# Altium PCB BB_BME680.PcbDoc
Units mm, origin at the board's own origin, x right, y up, seen from the top; angles counter-clockwise.
Board outline 39.15 x 31.32 mm, 2 copper layers (Top Layer, Bottom Layer); 16 components, 10 nets, 49 pads, 10 vias.
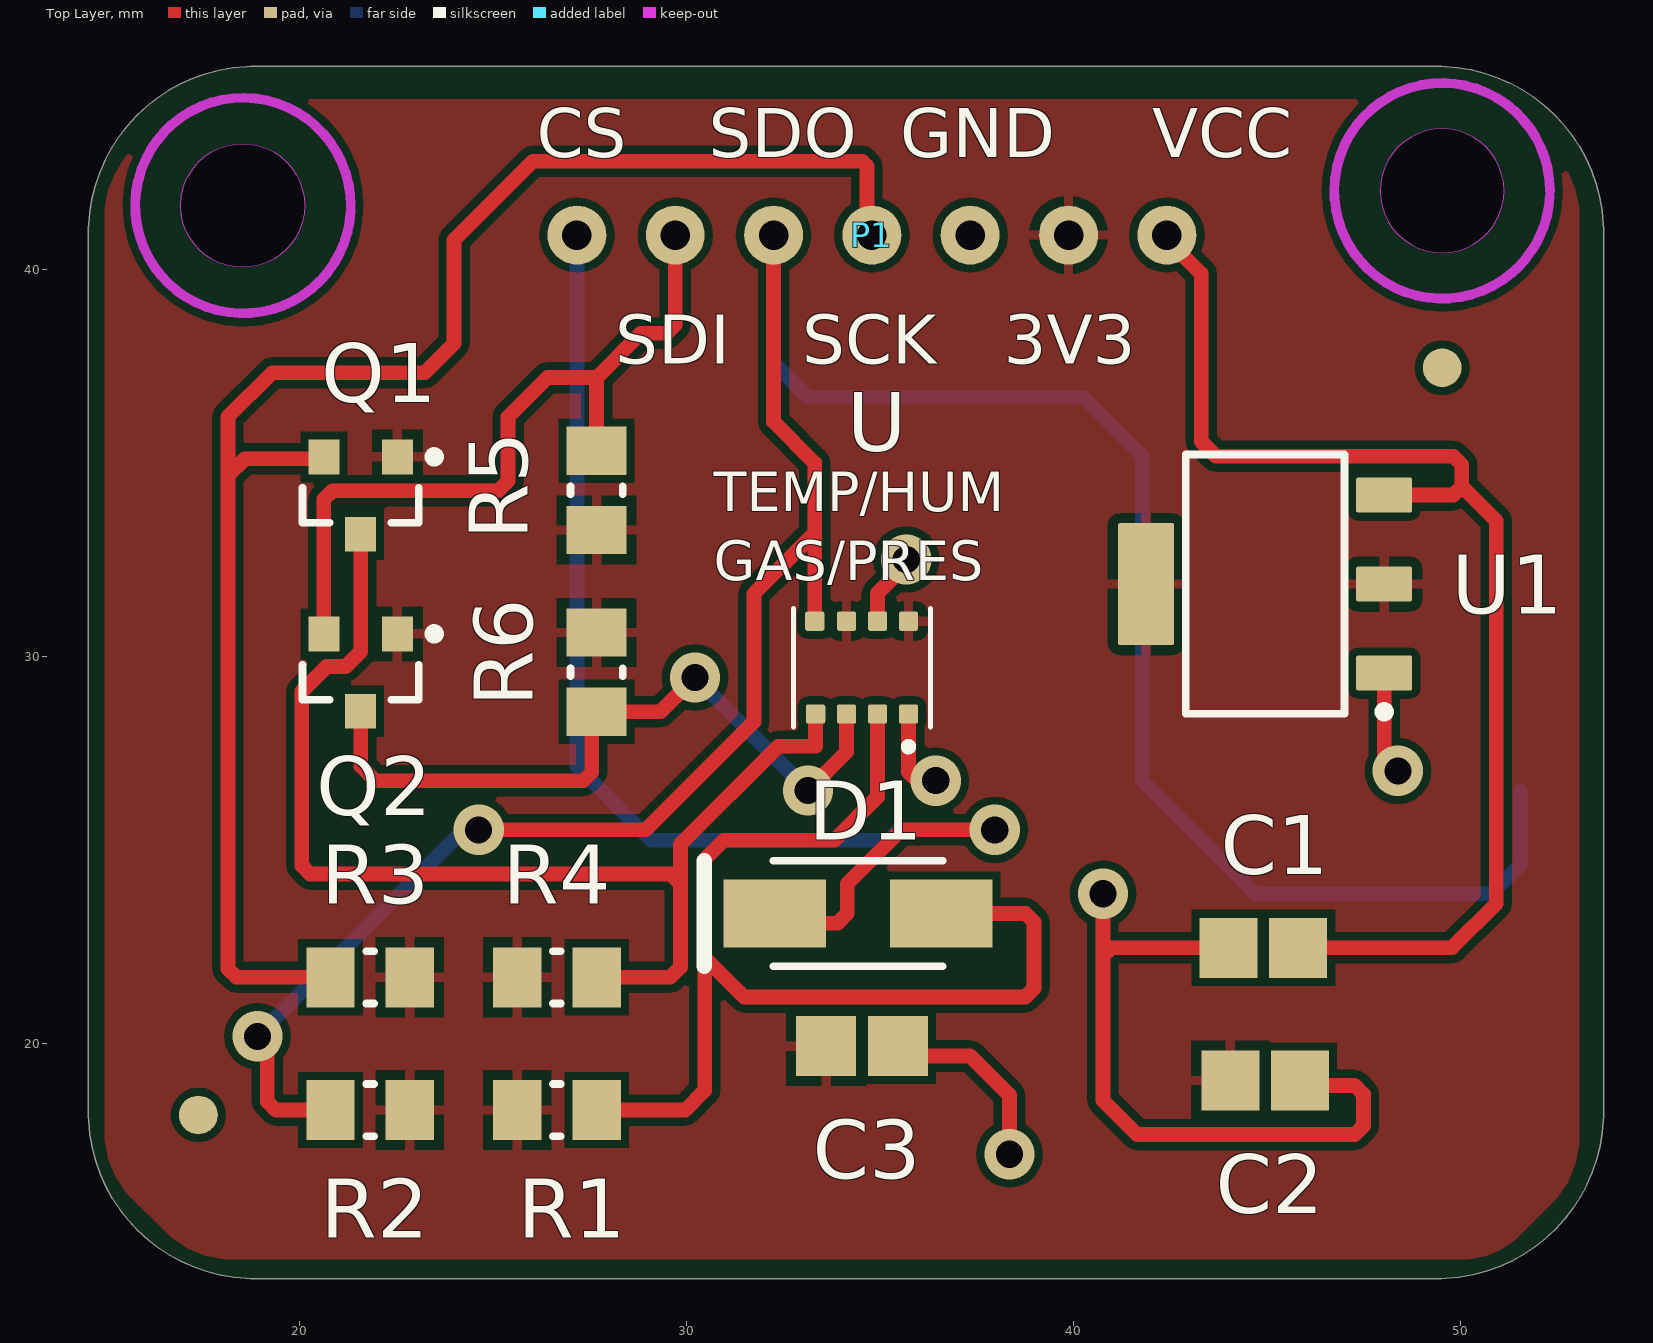
[diagram p0: Top Layer view]
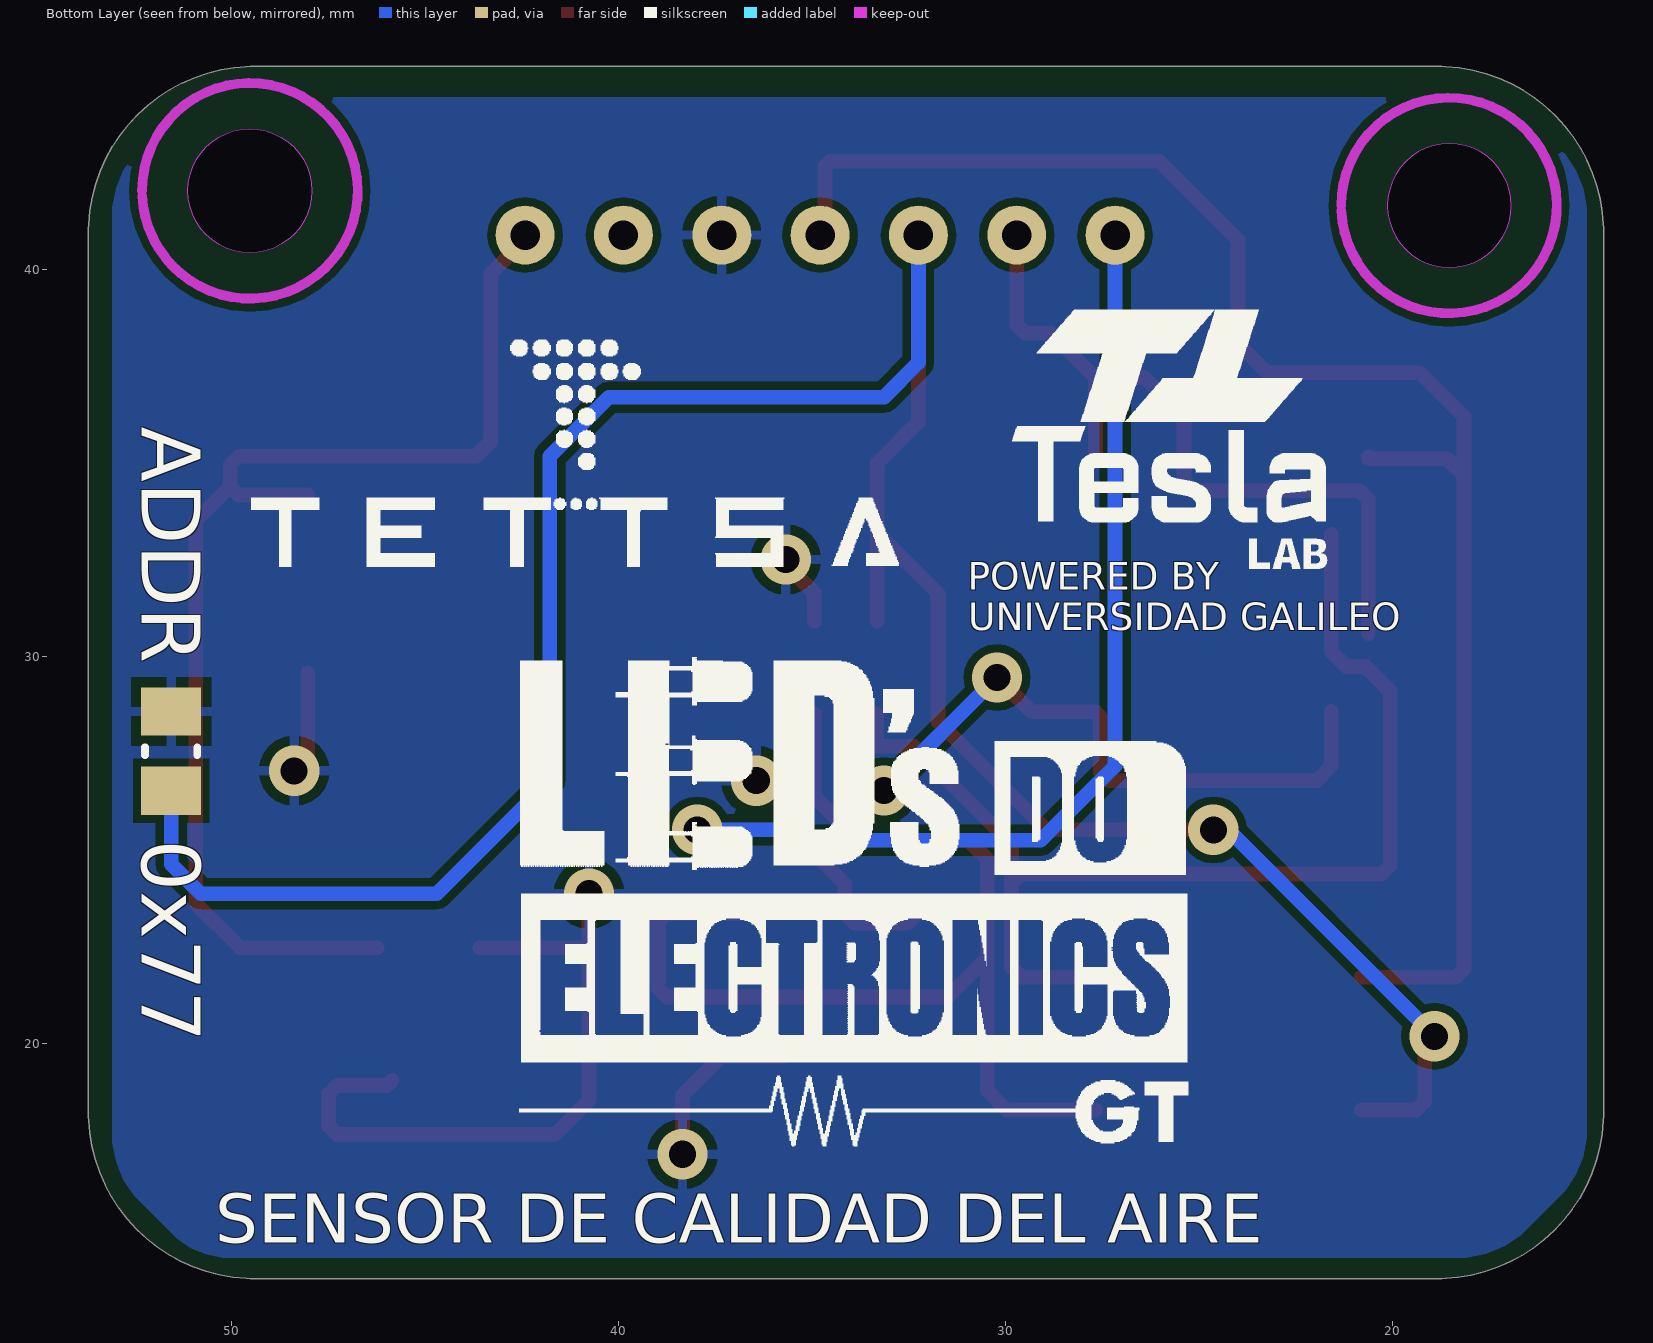
[diagram p1: Bottom Layer view, seen from below]

## Layer stack, top to bottom
Top Solder: solder mask 0.0102, Solder Resist, Dk 3.5
Top Layer: signal copper 0.0356
Dielectric 1: dielectric 0.32, FR-4, Dk 4.8
Bottom Layer: signal copper 0.0356
Bottom Solder: solder mask 0.0102, Solder Resist, Dk 3.5

## Board outline
14.562,18.013 cw(c18.925,18.232) 14.556,18.232 14.556,40.953 cw(c18.925,40.953) 14.562,41.179 cw(c18.88,40.955) 14.588,41.479 cw(c18.855,40.952) 18.635,45.246 cw(c18.854,40.882) 18.855,45.251 49.404,45.251 cw(c49.405,40.883) 49.631,45.245 cw(c49.407,40.928) 49.93,45.219 cw(c49.403,40.952) 53.697,41.172 cw(c49.334,40.953) 53.703,40.953 53.703,18.232 cw(c49.334,18.232) 53.697,18.006 cw(c49.379,18.23) 53.671,17.706 cw(c49.404,18.233) 49.624,13.94 cw(c49.405,18.303) 49.404,13.934 18.855,13.934 cw(c18.854,18.302) 18.628,13.94 cw(c18.852,18.257) 18.329,13.966 cw(c18.855,18.233)
cut-out: 18.542,40.056 cw(c18.542,41.656) 16.942,41.656 cw(c18.542,41.656) 18.542,43.256 cw(c18.542,41.656) 20.142,41.656 cw(c18.542,41.656)
cut-out: 47.93,42.037 ccw(c49.53,42.037) 49.53,40.437 ccw(c49.53,42.037) 51.13,42.037 ccw(c49.53,42.037) 49.53,43.637 ccw(c49.53,42.037)

## Design rules (kind name [scope] priority, off if disabled: settings)
Clearance [All] p1: gap=0.203 ignorepadtopadclearanceinfootprint=FALSE except(0: Arc-Hole Track-Hole SMDPad-Hole THPad-Hole Via-Hole Fill-Hole Poly-Hole Region-Hole Text-Hole; 0.254: Arc-Text Track-Text SMDPad-Text THPad-Text Via-Text Fill-Text Poly-Text Region-Text Text-Text)
HoleSize [All] p1: absolutevalues=TRUE maxlimit=2.54 minlimit=0.5 maxpercent=80.000 minpercent=20.000
MinimumAnnularRing [All] p1: minimumring=0.3
MinimumSolderMaskSliver [All] p1: minsoldermaskwidth=0.05
PolygonConnect [All] p1: connectstyle=Relief reliefconductorwidth=0.254 reliefentries=4 polygonreliefangle="90 Angle" airgapwidth=0.254
RoutingVias [All] p1: holewidth=0.711 width=1.27 viastyle="Through Hole" minholewidth=0.711 minwidth=1.27 maxholewidth=0.711 maxwidth=1.27
SilkToSolderMaskClearance [IsPad] p1: minsilkscreentomaskgap=0.05 clearancetoexposedcopper=TRUE
SolderMaskExpansion [All] p1: expansion=0.102 istentingtop=FALSE
Width [All] p1: maxlimit=0.635 minlimit=0.203 preferedwidth=0.254
27 further rules are at their usual default settings.

## Components (designator, comment, footprint, x,y, rotation, side; value= is the part's Value field where it differs from the comment)
ADDR "JUMPER" RESC2013X60X30ML20T20 51.562,27.559 r90 bottom
C1 "C0805C106K4PACTU" CAPC2013X140X50ML20T25 44.912,22.479 r180 top
C2 "C0805C106K4PACTU" CAPC2013X140X50ML20T25 44.958,19.05 r180 top
C3 "08051C104KAT2A" CAPC2013X94X50ML20T25 34.544,19.939 r180 top
D1 "S1G" FAIR-DO-214AC-2_V 34.436,23.368 r180 top
P1 "PIN_HEADER_7" PIN_HEADER_7 27.178,40.894 r0 top
Q1 "BSS138-7-F" DIOD-SOT23-3_V 21.59,34.163 r270 top
Q2 "BSS138-7-F" DIOD-SOT23-3_V 21.59,29.591 r270 top
R1 "RK73B2ATTD103J" RESC2013X60X30ML20T20 26.661,18.288 r0 top
R2 "RK73B2ATTD103J" RESC2013X60X30ML20T20 21.835,18.288 r180 top
R3 "RK73B2ATTD103J" RESC2013X60X30ML20T20 21.835,21.717 r180 top
R4 "RK73B2ATTD103J" RESC2013X60X30ML20T20 26.661,21.717 r0 top
R5 "RK73B2ATTD103J" RESC2013X60X30ML20T20 27.686,34.299 r90 top
R6 "RK73B2ATTD103J" RESC2013X60X30ML20T20 27.686,29.6 r270 top
U "BME680" BME680 34.544,29.718 r270 top
U1 "LM1117MPX-3.3/NOPB" DCY0004A_L 44.958,31.877 r180 top

## Footprints (in the part's own frame and the unit in brackets; to place one, negate y for a bottom-side part, rotate by r counter-clockwise, add the part's x,y. Pads: shape width x height; smd on the part's side, far side on the other; paste and mask are expansions set on the pad)
BME680 [mm]
  rrect25% 0.5x0.5 smd: 1(1.2,1.2) 2(1.2,0.4) 3(1.2,-0.4) 4(1.2,-1.2) 5(-1.2,-1.22) 6(-1.2,-0.4) 7(-1.2,0.4) 8(-1.2,1.2)
  silkscreen extent -1.53,-1.77 2.14,1.77, body extent -1.5,-1.5 1.5,1.5, height 1
CAPC2013X94X50ML20T25 [mm] "Chip Capacitor, 2-Leads, Body 2.01x1.25mm, IPC Low Density"
  rect 1.55x1.55 smd: 1(-0.925,0) 2(0.925,0)
  body extent -1.1,-0.72 1.11,0.72, height 0.94
CAPC2013X140X50ML20T25 [mm] "Chip Capacitor, 2-Leads, Body 2.00x1.25mm, IPC Low Density"
  rect 1.5x1.55 smd: 1(-0.9,0) 2(0.9,0)
  body extent -1.1,-0.72 1.1,0.72, height 1.4
DCY0004A_L [mm] "SOT223, 4-Leads, Body 6.7x3.7mm, Pitch 2.3mm, IPC High Density"
  rrect11% 1.45x0.9 smd: 1(-3.075,2.3) 2(-3.075,0) 3(-3.075,-2.3)
  rrect7% 1.45x3.15 smd: 4(3.075,0)
  silkscreen extent -3.2,-3.35 2.05,3.42, body extent -3.5,-3.25 3.5,3.25, height 1.62
DIOD-SOT23-3_V [mm] "SOT23, 3-Leads, Body 3x1.4mm, Pitch 0.95mm"
  rect 0.9x0.8 smd: 1(-1,0.95) 2(-1,-0.95) 3(1,0)
  silkscreen extent -1.12,-1.5 0.7,2.03, body extent -1.25,-1.5 1.25,1.5, height 1.1
FAIR-DO-214AC-2_V [mm] "DO-214, 2-Leads, Body 4.375x2.725mm"
  rect 2.65x1.75 smd: 1(-2.15,0) 2(2.15,0)
  silkscreen extent -2.19,-1.36 3.98,1.36, body extent -2.19,-1.36 2.19,1.36, height 2.5
PIN_HEADER_7 [mil]
  round 60 hole 30: 1(0,0) 2(100,0) 3(200,0) 4(300,0) 5(400,0) 6(500,0) 7(600,0)
  body extent -50,-50 650,50, height 336
RESC2013X60X30ML20T20 [mm] "Chip Resistor, 2-Leads, Body 2.00x1.25mm, IPC Low Density"
  rect 1.25x1.55 smd: 1(-1.025,0) 2(1.025,0)
  silkscreen extent -0.1,-0.67 0.1,0.67, body extent -1.1,-0.72 1.1,0.72, height 0.6

## Part data
ADDR: library part CMP-2001-04657-1, "10 kOhms ±5% 0.25W, 1/4W Chip Resistor 0805 (2012 Metric) Automotive AEC-Q200, Moisture Resistant Thick Film", Manufacturer="KOA Speer", Part Number=RK73B2ATTD103J
C1 C2: library part CMP-2007-03242-1, "10µF ±10% 16V Ceramic Capacitor X5R 0805 (2012 Metric)", Part Number=CL21A106KOQNNNG
C3: library part CMP-2007-04174-1, Manufacturer="AVX Interconnect / Elco", Part Number=08051C104KAT2A
D1: library part CMP-2000-07011-1, "General Purpose Rectifier, 1.4 W, -55 to 150 degC, 2-Pin DO-214AC, RoHS, Tape and Reel", Average Rectified Current-Max=1A, Forward Voltage=1.1V, Manufacturer="Fairchild Semiconductor", Package Description="2-Pin Surface Mount Device, Body 4.375 x 2.725 mm", Package Reference=DO-214AC-2, Power Dissipation Max=1400mW, Reverse Current-Max=1µA, Reverse Voltage-Max [Vrrm]=400V, Datasheet URL=https://www.fairchildsemi.com/datasheets/S1/S1G.pdf, Datasheet Version="Rev. 2.10, 05/2015", Manufacturer URL=https://www.fairchildsemi.com/, Mounting Technology=SurfaceMount, Package URL=https://www.fairchildsemi.com/package-drawings/DO/DO214AC.pdf, PartNumber=S1G, Reverse Recovery Time-Max=1.8µs, Trr=1800ns, VRRM Max=400V
Q1 Q2: library part CMP-2000-04930-1, "N-Channel Enhancement Mode Mosfet, 50 V, 0.2 A, -55 to 150 degC, 3-Pin SOT23, RoHS, Tape and Reel", Id - Continuous Drain Current=200mA, Manufacturer="Diodes Inc", Maximum Operating Temperature=+150C, Minimum Operating Temperature=-55C, Package / Case=SOT-23-3, Package Description="3-Pin Small Outline Transistor, Body 2.9 x 1.3 mm, Pitch 0.96 mm", Package Reference=SOT23-3, Pd - Power Dissipation=300mW, Rds On - Drain-Source Resistance=3.5Ohms, Vds - Drain-Source Breakdown Voltage=50V, Vgs - Gate-Source Voltage=20V, Brand=DiodesIncorporated, Channel Mode=Enhancement, Configuration=Single, Datasheet URL=https://datasheet.ciiva.com/8115/ds30144-8115344.pdf, Datasheet Version="Rev. 20-2, 11/2013", Factory Pack Quantity=3000, Height=1mm, Length=2.9mm, Manufacturer URL=http://www.diodes.com/, Mounting Style=SMD/SMT, Number of Channels=1Channel, Packaging=Reel, Product=MOSFETSmallSignal, Product Category=MOSFET, RoHS=True, Series=BSS138, Technology=Si, Transistor Polarity=N-Channel, Transistor Type=1N-Channel, Typical Turn-Off Delay Time=20ns, Typical Turn-On Delay Time=20ns, Unit Weight=0.000282oz, Width=1.3mm
R1 R2 R3 R4 R5 R6: library part CMP-2001-04657-1, "10 kOhms ±5% 0.25W, 1/4W Chip Resistor 0805 (2012 Metric) Automotive AEC-Q200, Moisture Resistant Thick Film", Manufacturer="KOA Speer", Part Number=RK73B2ATTD103J
U: "Gas, Humidity, Pressure, Temperature Sensor IÂ²C, SPI Output", Package="LGA-8 Bosch Tools", Availability=Unavailable, MF="Bosch Sensortec", MP=BME680, Price=None, SnapEDA_Link=https://www.snapeda.com/parts/BME680/Bosch%20Sensortec/view-part/947201/?ref=snap
U1: library part CMP-0062-01639-4, "800mA Low-Dropout Linear Regulator, 4-pin SOT-223, Pb-Free", Manufacturer="Texas Instruments", PackageTopMarking=XYTT*N05A, PowerWise=N, Code_IPC=SOT223-4, Code_JEDEC=TO-261-AA, ComponentLink1Description="Datasheet URL", ComponentLink1URL=http://www.ti.com/general/docs/lit/getliterature.tsp?genericPartNumber=LM1117-N&fileType=pdf, CompType="LDO IC", High-Reliability=Y, PackageDescription="Molded SOT-223, 6.50 x 3.56 x 1.6mm Body, 4 Lead, 2.3mm Pitch", PackageReference=DCY0004A, PartNumber=LM1117MPX-3.3/NOPB, PinCount=4, RoHS=Y

## Free pads (board coordinates)
  round 1 smd paste+0: 100(17.399,18.161) 100(49.53,37.465)

## Via types
v1: diameter 1.3, hole 0.7, Top Layer to Bottom Layer, tented both sides, 10 vias

## Nets (pads, with @x,y where several pads share a name; then routed paths per layer and width w, separated by ;. In a path a pad name is that pad's centre, name@x,y a point inside that pad or via, vN(x,y) a via of type N, cw(c..) or ccw(c..) an arc to the next point about the centre after c; other vN are vias at no path point)
3V3: C2.2 C3.2 P1.6 Q1.1 Q2.1 R1.1 R2.1 R3.1 R4.1 R5.1 R6.1 U1.2 U1.4 U.6 U.8
CS: D1.2 P1.1 | length 32.7
  Top Layer w0.381: D1.2 32.54,23.114 33.909,23.114 34.163,23.368 34.163,24.13 35.56,25.527 v1(37.973,25.527)
  Bottom Layer w0.381: P1.1 27.178,27.178 29.096,25.26 35.22,25.26 35.487,25.527 v1(37.973,25.527)
CS_3V: D1.1 R1.2 U.2 | length 29.5
  Top Layer w0.381: R1.2 29.972,18.288 30.48,18.796 30.48,22.225 ; U.2 34.944,26.377 33.827,25.26 30.975,25.26 30.48,24.765 30.48,22.225 ; D1.1 38.766,23.368 38.989,23.145 38.989,21.432 38.766,21.209 31.496,21.209 31.369,21.336 30.48,22.225
GND: ADDR.2 C1.2 C2.1 C3.1 P1.5 U1.1 U.1 U.7 | length 29.9
  Top Layer w0.381: U.7 34.944,31.642 35.687,32.385 v1(35.687,32.512) ; C3.1 35.723,19.685 37.338,19.685 38.354,18.669 v1(38.354,17.145) ; U.1 35.744,27.02 35.967,26.797 v1(36.449,26.797) ; v1(40.767,23.876) 40.767,22.256 ; C1.2@43.587,22.479 40.99,22.479 40.767,22.256 ; C2.1 45.985,18.923 47.275,18.923 47.498,18.7 47.498,17.876 47.275,17.653 41.656,17.653 40.767,18.542 40.767,22.256 ; U1.1 48.033,27.405 v1(48.387,27.051)
SCK/SCL: P1.4 Q1.2 R3.2 | length 42.4
  Top Layer w0.381: Q1.2 20.64,35.113 18.603,35.113 18.161,34.671 ; R3.2 18.384,21.717 18.161,21.94 18.161,34.671 ; P1.4 34.671,41.021 34.671,42.672 34.544,42.799 26.035,42.799 24.003,40.767 24.003,38.1 23.241,37.338 19.304,37.338 18.161,36.195 18.161,34.671
SCK_3V: Q1.3 R4.2 U.4 | length 30.3
  Top Layer w0.381: Q1.3 21.59,30.134 21.203,29.747 20.713,29.747 20.066,29.101 20.066,24.607 20.289,24.384 29.604,24.384 29.851,24.136 ; R4.2 29.591,21.717 29.851,21.977 29.851,24.136 ; U.4 33.344,27.687 32.386,27.687 29.851,25.152 29.851,24.136
SDI/SDA: P1.2 Q2.2 R5.2 | length 19.6
  Top Layer w0.381: Q2.2 20.64,34.067 20.863,34.29 25.146,34.29 25.4,34.544 25.4,36.195 26.416,37.211 27.686,37.211 ; R5.2 27.686,37.211 ; P1.2 29.718,38.577 29.495,38.354 28.829,38.354 27.686,37.211
SDI_3V: Q2.3 R6.2 U.3 | length 18.7
  Top Layer w0.381: Q2.3 21.59,27.178 21.971,26.797 27.336,26.797 27.559,27.02 27.559,28.448 R6.2 29.337,28.575 v1(30.226,29.464) ; v1(33.147,26.543) 34.144,27.54 U.3
  Bottom Layer w0.381: v1(30.226,29.464) v1(33.147,26.543)
SDO/ADR: ADDR.1 P1.3 R2.2 U.5 | length 71.1
  Top Layer w0.381: v1(18.923,20.193) 19.177,19.939 19.177,18.511 19.4,18.288 R2.2 ; v1(24.638,25.527) 28.956,25.527 31.75,28.321 31.75,31.623 33.324,33.197 ; P1.3 32.258,36.068 33.324,35.002 33.324,33.197 ; U.5 33.324,33.197
  Bottom Layer w0.381: v1(18.923,20.193) 24.257,25.527 v1(24.638,25.527) ; P1.3 32.258,37.592 33.147,36.703 40.259,36.703 41.783,35.179 41.783,26.797 44.704,23.876 50.8,23.876 51.562,24.638 ADDR.1
VCC: C1.1 P1.7 U1.3 | length 31.6
  Top Layer w0.381: P1.7 42.418,40.786 43.307,39.897 43.307,35.56 43.688,35.179 49.815,35.179 50.038,34.956 50.038,34.4 ; C1.1@46.237,22.479 49.784,22.479 50.927,23.622 50.927,33.511 50.038,34.4 ; U1.3 49.815,34.177 50.038,34.4

## Polygon pours and split planes (outlines as drawn)
3V3 on Top Layer "3V3_L01_P008" (solid, remove dead copper, pour order 8): 49.989,44.403 cw(c49.989,41.863) 51.785,43.659 52.329,43.115 cw(c50.533,41.319) 53.073,41.319 53.073,17.642 cw(c50.533,17.642) 52.329,15.846 51.543,15.059 cw(c50.025,16.577) 50.025,14.431 18.311,14.431 cw(c18.311,16.971) 16.515,15.175 15.717,15.973 cw(c17.513,17.769) 14.973,17.769 14.973,41.319 cw(c17.513,41.319) 15.717,43.115 16.261,43.659 cw(c18.057,41.863) 18.057,44.403
no net on Top Layer "NONET_L01_P001" (solid, remove dead copper, pour order 1): 53.086,17.653
GND on Bottom Layer "GND_L02_P007" (solid, remove dead copper, pour order 7): 50.002,44.45 cw(c50.002,41.91) 51.798,43.706 52.342,43.162 cw(c50.546,41.366) 53.086,41.366 53.086,17.689 cw(c50.546,17.689) 52.342,15.893 51.556,15.107 cw(c50.038,16.624) 50.038,14.478 18.324,14.478 cw(c18.324,17.018) 16.528,15.222 15.73,16.02 cw(c17.526,17.816) 14.986,17.816 14.986,41.366 cw(c17.526,41.366) 15.73,43.162 16.274,43.706 cw(c18.07,41.91) 18.07,44.45
no net on Bottom Layer "NONET_L02_P005" (solid, pour order 5): 19.05,44.45

## Keep-outs
Keep-Out Layer:
  lines w0.254: 21.333,41.53 cw(c18.551,41.656) 21.336,41.656 ; 52.312,41.911 cw(c49.53,42.037) 52.315,42.037

## Silkscreen, mask and mechanical layers (free items; w line width, h text height)
Top Overlay:
  pour cut-out: 18.542,40.056 cw(c18.542,41.656) 16.942,41.656 cw(c18.542,41.656) 18.542,43.256 cw(c18.542,41.656) 20.142,41.656 cw(c18.542,41.656)
  text "CS" at 26.137,42.901 h1.27
  text "SDO" at 30.582,42.901 h1.27
  text "GND" at 35.535,42.901 h1.27
  text "VCC" at 42.037,42.901 h1.27
  text "SDI" at 28.169,37.567 h1.27
  text "SCK" at 32.995,37.567 h1.27
  text "3V3" at 38.202,37.567 h1.27
  text "TEMP/HUM" at 30.709,33.757 h1.02
  text "GAS/PRES" at 30.709,31.979 h1.02
Bottom Overlay:
  drawing of 49 lines, arcs and shapes, not listed
  text "POWERED BY" at 30.987,31.5 h1.21
  text "UNIVERSIDAD GALILEO" at 30.965,30.454 h1.21
  text "0x77" at 52.324,25.273 h1.52 r90
  text "SENSOR DE CALIDAD DEL AIRE" at 50.419,14.859 h1.27
Mechanical 1:
  circle w0.254: c18.542,41.656 r1.6
  circle w0.254: c49.53,42.037 r1.6
  lines w0.157: 14.556,18.232 ccw(c18.925,18.232) 14.562,18.013 ccw(c18.855,18.233) 18.329,13.966 ccw(c18.852,18.257) 18.628,13.94 ccw(c18.854,18.302) 18.855,13.934 49.404,13.934 ccw(c49.405,18.303) 49.624,13.94 ccw(c49.404,18.233) 53.671,17.706 ccw(c49.379,18.23) 53.697,18.006 ccw(c49.334,18.232) 53.703,18.232 53.703,40.953 ccw(c49.334,40.953) 53.697,41.172 ccw(c49.403,40.952) 49.93,45.219 ccw(c49.407,40.928) 49.631,45.245 ccw(c49.405,40.883) 49.404,45.251 18.855,45.251 ccw(c18.854,40.882) 18.635,45.246 ccw(c18.855,40.952) 14.588,41.479 ccw(c18.88,40.955) 14.562,41.179 ccw(c18.925,40.953) 14.556,40.953 14.556,18.232